# Altium PCB AuxPDU.PcbDoc
Units mm, origin at the board's own origin, x right, y up, seen from the top; angles counter-clockwise.
Board outline 103.03 x 90.12 mm, 2 copper layers (Top Layer, Bottom Layer); 62 components, 27 nets, 168 pads, 55 vias.
Unrouted connection lines stored in the file: 6.
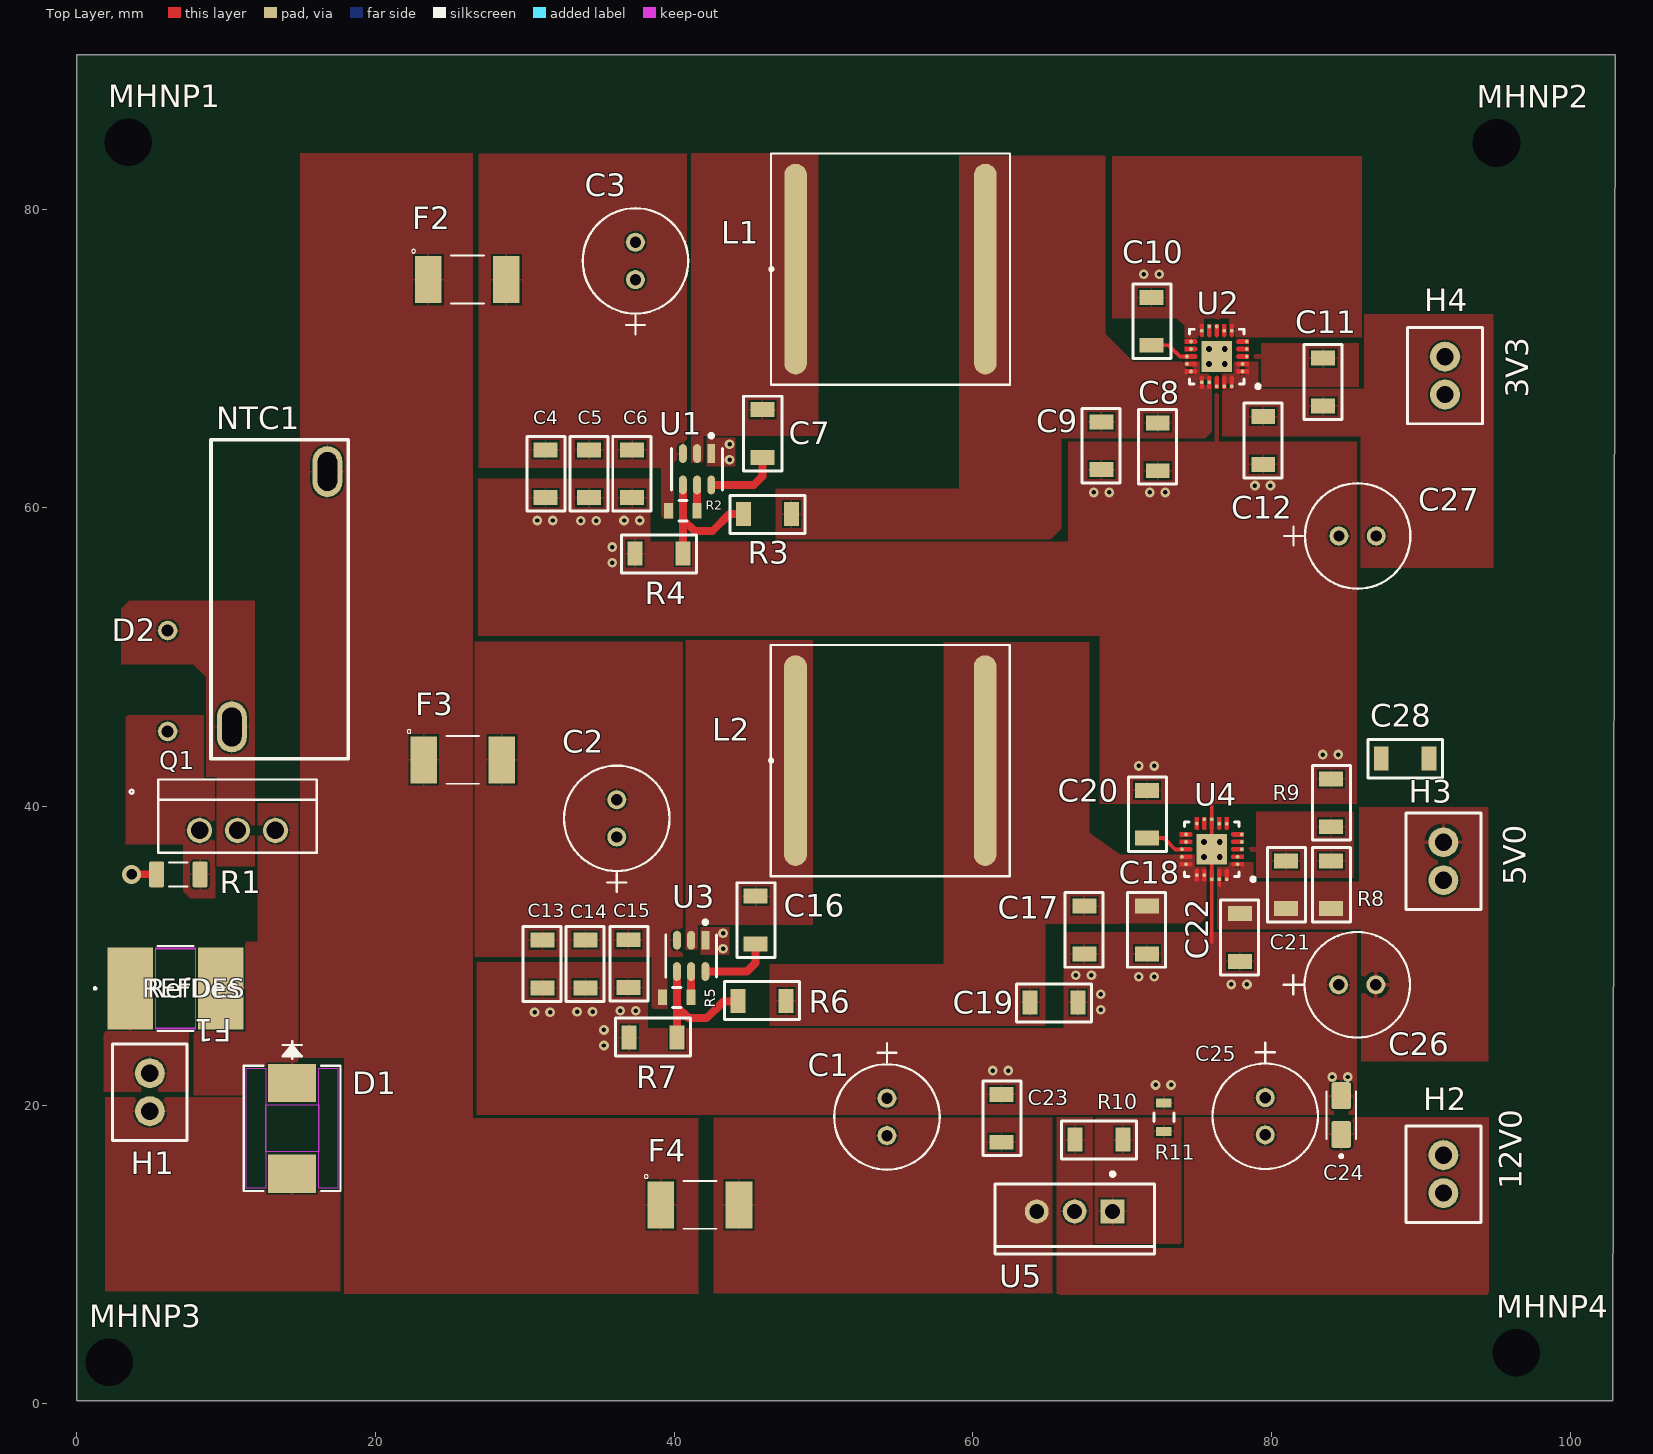
[diagram p0: Top Layer view]
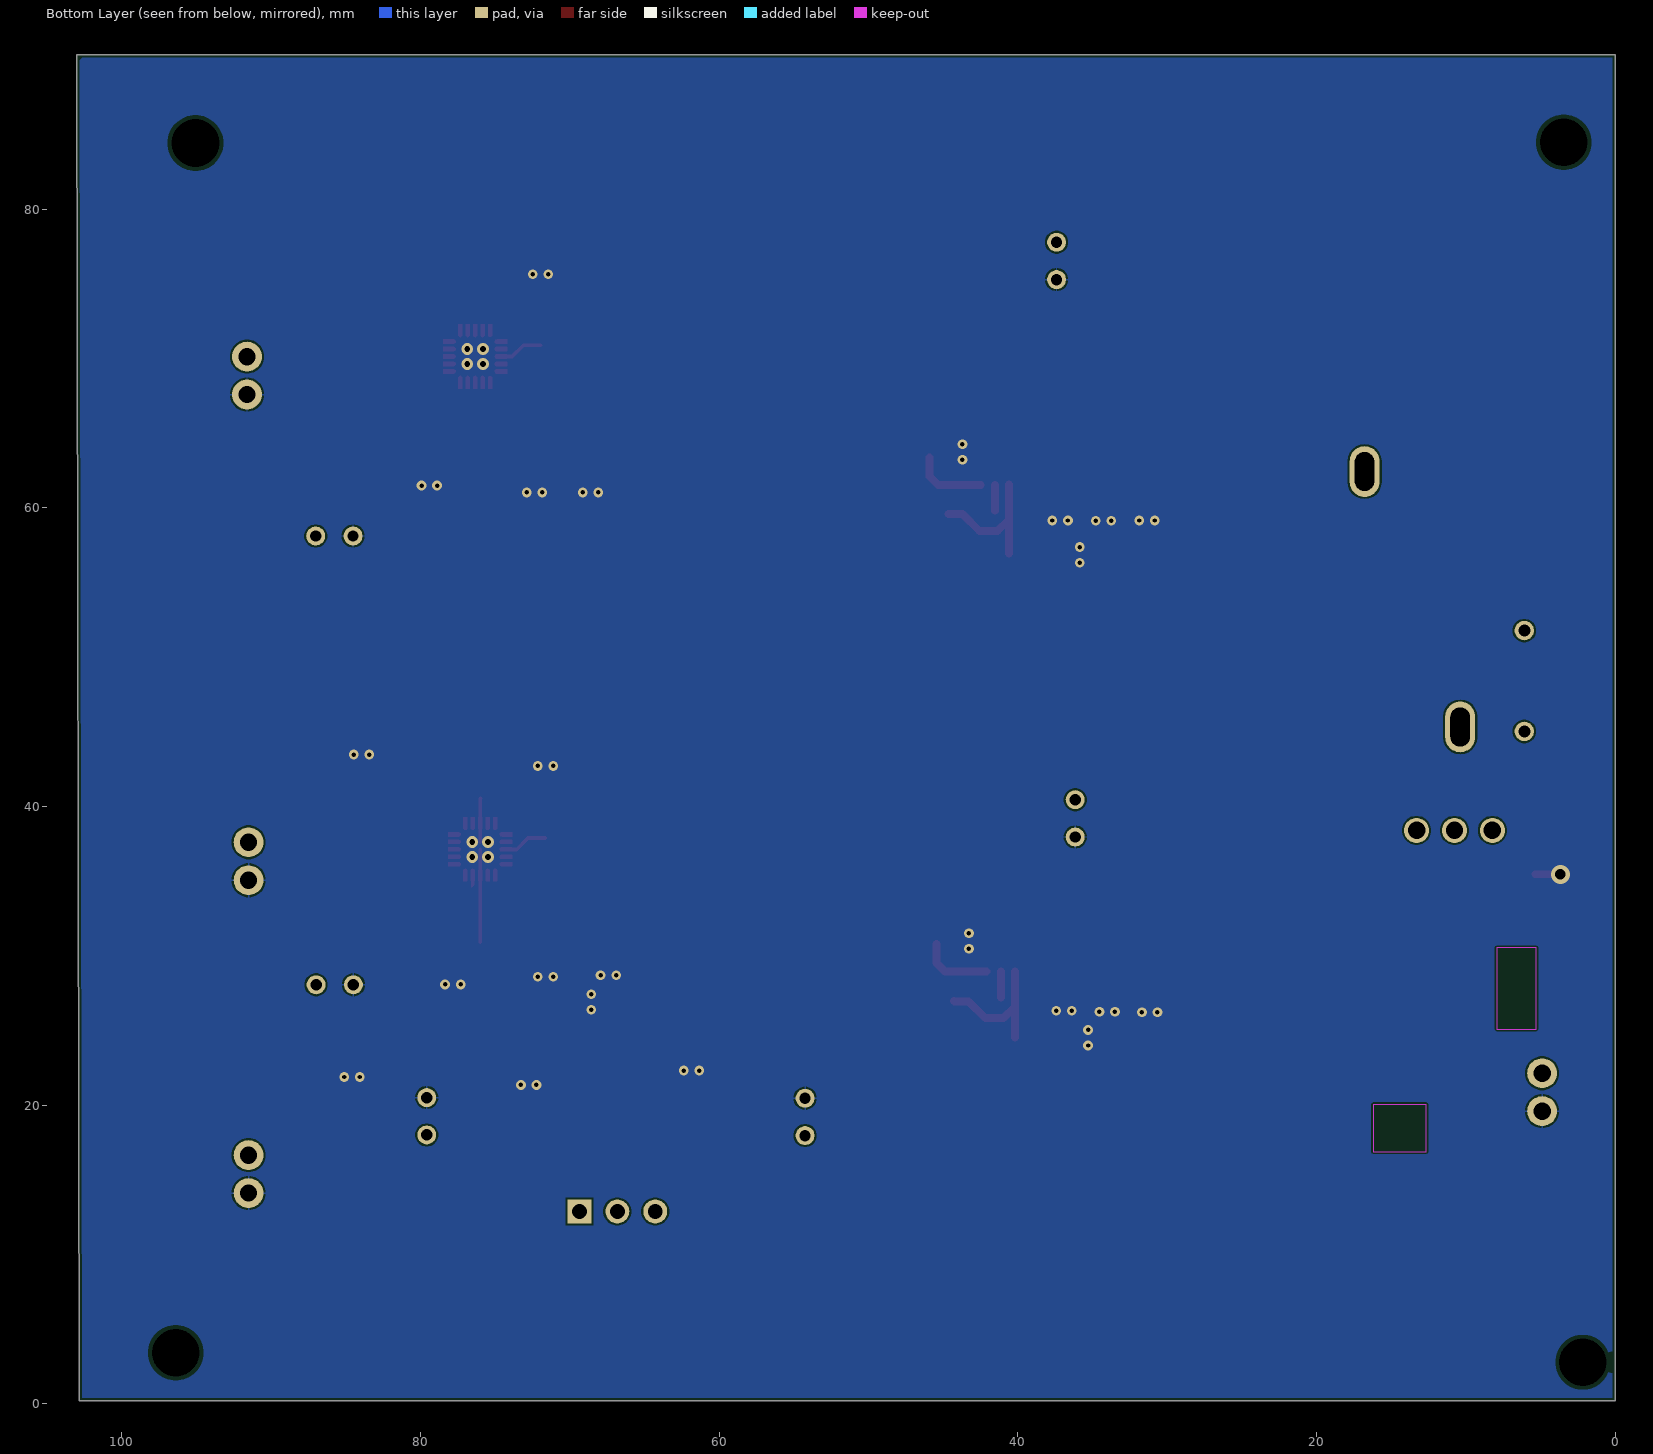
[diagram p1: Bottom Layer view, seen from below]

## Layer stack, top to bottom
Top Solder: solder mask 0.0102, Solder Resist, Dk 3.5
Top Layer: signal copper 0.0356
Dielectric 1: dielectric 0.32, FR-4, Dk 4.8
Bottom Layer: signal copper 0.0356
Bottom Solder: solder mask 0.0102, Solder Resist, Dk 3.5

## Board outline
0,90.348 0,0.229 102.845,0.229 102.845,1.168 103.026,90.348

## Design rules (kind name [scope] priority, off if disabled: settings)
BoardOutlineClearance [All] p1: gap=0.2 ignorepadtopadclearanceinfootprint=FALSE
Clearance [All] p1: gap=0.127 ignorepadtopadclearanceinfootprint=TRUE except(0.254: Arc-Hole Track-Hole SMDPad-Hole THPad-Hole Via-Hole Fill-Hole Poly-Hole Region-Hole Text-Hole)
ComponentClearance [All] p1: gap=0.127 collisioncheckmode=3 verticalgap=0.127 showdistances=TRUE
DiffPairsRouting [All] p1: maxlimit=0.254 minlimit=0.127 mostfreqgap=0.127 toplayer_minwidth=0.127 toplayer_maxwidth=25.4 toplayer_prefwidth=0.127 bottomlayer_minwidth=0.127 bottomlayer_maxwidth=25.4 bottomlayer_prefwidth=0.127 maxuncoupledlength=12.7
Height [All] p1: minheight=0 maxheight=1816.048 prefheight=12.7
HoleSize [All] p1: absolutevalues=TRUE maxlimit=6.3 minlimit=0.3 maxpercent=80.000 minpercent=20.000
HoleToHoleClearance [All] p1: gap=0.254 allowstackedmicrovias=FALSE
MinimumAnnularRing [All] p1: minimumring=0.152
MinimumSolderMaskSliver [All] p1: minsoldermaskwidth=0.152
PlaneClearance [All] p1: clearance=0.127
PlaneConnect PlaneConnectPowerPads [InPadClass('PowerPads')] p1: planeconnectstyle=Direct reliefexpansion=0.508 reliefentries=4 reliefconductorwidth=0.254 reliefairgap=0.254
PlaneConnect [All] p2: pad.planeconnectstyle=Relief pad.reliefexpansion=0.3 pad.reliefentries=4 pad.reliefconductorwidth=0.127 pad.reliefairgap=0.127 via.planeconnectstyle=Direct via.reliefexpansion=0.3 via.reliefentries=4 via.reliefconductorwidth=0.127 via.reliefairgap=0.127
PolygonConnect PolygonConnect_2 [All vs IsNamedPolygon('NETC17_1_L01_P008')] p1: thpad.connectstyle=Relief thpad.reliefconductorwidth=0.254 thpad.reliefentries=4 thpad.polygonreliefangle="90 Angle" thpad.airgapwidth=0.254 smdpad.connectstyle=Direct smdpad.reliefconductorwidth=0.254 smdpad.reliefentries=4 smdpad.polygonreliefangle="90 Angle" smdpad.airgapwidth=0.254 via.connectstyle=Relief via.reliefconductorwidth=0.254 via.reliefentries=4 via.polygonreliefangle="90 Angle" via.airgapwidth=0.254
PolygonConnect PolygonConnect_1 [All vs IsNamedPolygon('5VOUT_L01_P004')] p2: thpad.connectstyle=Relief thpad.reliefconductorwidth=0.254 thpad.reliefentries=4 thpad.polygonreliefangle="90 Angle" thpad.airgapwidth=0.254 smdpad.connectstyle=Direct smdpad.reliefconductorwidth=0.254 smdpad.reliefentries=4 smdpad.polygonreliefangle="90 Angle" smdpad.airgapwidth=0.254 via.connectstyle=Relief via.reliefconductorwidth=0.254 via.reliefentries=4 via.polygonreliefangle="90 Angle" via.airgapwidth=0.254
PolygonConnect PolygonConnectPowerPads [All vs (InPadClass('PowerPads'))] p3: connectstyle=Direct reliefconductorwidth=0.254 reliefentries=4 polygonreliefangle="90 Angle" airgapwidth=0.254
PolygonConnect [All] p4: thpad.connectstyle=Relief thpad.reliefconductorwidth=0.127 thpad.reliefentries=4 thpad.polygonreliefangle="90 Angle" thpad.airgapwidth=0.127 smdpad.connectstyle=Relief smdpad.reliefconductorwidth=0.127 smdpad.reliefentries=4 smdpad.polygonreliefangle="90 Angle" smdpad.airgapwidth=0.127 via.connectstyle=Direct via.reliefconductorwidth=0.127 via.reliefentries=4 via.polygonreliefangle="90 Angle" via.airgapwidth=0.127
RoutingVias [All] p1: holewidth=0.3 width=0.6 viastyle="Through Hole" minholewidth=0.3 minwidth=0.6 maxholewidth=0.6 maxwidth=6.6
SilkToSilkClearance [All] p1: silktosilkclearance=0.127
SilkToSolderMaskClearance [IsPad] p1: minsilkscreentomaskgap=0.127 clearancetoexposedcopper=TRUE
SolderMaskExpansion [All] p1: expansion=0.051 istentingtop=FALSE
SupplyNets "Schematic Supply Nets_7" [InNet('12to12Vin')] p1: voltage=0.000
SupplyNets "Schematic Supply Nets_6" [InNet('Vin')] p2: voltage=0.000
SupplyNets "Schematic Supply Nets_5" [InNet('5Vout')] p3: voltage=0.000
SupplyNets "Schematic Supply Nets_4" [InNet('12Vout')] p4: voltage=0.000
SupplyNets "Schematic Supply Nets_3" [InNet('12to5Vin')] p5: voltage=0.000
SupplyNets "Schematic Supply Nets_2" [InNet('GND')] p6: voltage=0.000
SupplyNets "Schematic Supply Nets_1" [InNet('3.3Vout')] p7: voltage=0.000
SupplyNets "Schematic Supply Nets" [InNet('12to3.3Vin')] p8: voltage=0.000
UnRoutedNet [All] p1: checkbadconnections=TRUE
Width Width_10mil [All] p1: maxlimit=25.4 minlimit=0.254 preferedwidth=0.254 minimp=50.000000 maximp=50.000000 favimp=50.000000
Width Width_6mil [All] p2: maxlimit=25.4 minlimit=0.152 preferedwidth=0.152 minimp=50.000000 maximp=50.000000 favimp=50.000000
Width Power_20mil [All] p3: maxlimit=25.4 minlimit=0.508 preferedwidth=0.508 minimp=50.000000 maximp=50.000000 favimp=50.000000
Width Power_12mil [All] p4: maxlimit=25.4 minlimit=0.305 preferedwidth=0.305 minimp=50.000000 maximp=50.000000 favimp=50.000000
Width Width_5mil [All] p5: maxlimit=25.4 minlimit=0.127 preferedwidth=0.127 minimp=50.000000 maximp=50.000000 favimp=50.000000
19 further rules are at their usual default settings.

## Components (designator, comment, footprint, x,y, rotation, side; value= is the part's Value field where it differs from the comment)
C1 "100 uF" CAP_YX_6P3X11_RUB 54.254,20.472 r270 top
C2 "100 uF" CAP_YX_6P3X11_RUB 36.166,37.962 r90 top
C3 "100 uF" CAP_YX_6P3X11_RUB 37.416,75.287 r90 top
C4 "100 nF" "CAP 1206" 31.391,58.68 r90 top
C5 "10 uF" "CAP 1206" 34.318,65.894 r270 top
C6 "10 uF" "CAP 1206" 37.195,65.894 r270 top
C7 "100 nF" "CAP 1206" 45.912,61.369 r90 top
C8 "22 uF" "CAP 1206" 72.391,67.694 r270 top
C9 "10 uF" "CAP 1206" 68.616,67.769 r270 top
C10 "10nF" "CAP 1206" 71.971,68.882 r90 top
C11 "10nF" "CAP 1206" 83.464,72.034 r270 top
C12 "47uF" "CAP 1206" 79.451,68.123 r270 top
C13 "10uF" "CAP 1206" 31.191,33.062 r270 top
C14 "10 uF" "CAP 1206" 34.068,33.071 r270 top
C15 "100 nF" "CAP 1206" 36.948,25.879 r90 top
C16 "100nF" "CAP 1206" 45.462,28.794 r90 top
C17 "22uF" "CAP 1206" 67.475,35.35 r270 top
C18 "22uF" "CAP 1206" 71.666,35.35 r270 top
C19 "10 uF" "CAP 1206" 61.834,26.887 r0 top
C20 "10nF" "CAP 1206" 71.666,35.883 r90 top
C21 "10nF" "CAP 1206" 80.981,31.159 r90 top
C22 "47uF" "CAP 1206" 77.889,34.842 r270 top
C23 "10 uF" "CAP 1206" 61.925,15.519 r90 top
C24 "10 uF Tantalum" CAPMP3216X180N 84.671,19.342 r90 top
C25 "100 uF" CAP_YX_6P3X11_RUB 79.585,20.516 r270 top
C26 "100 uF" CAP_YX_6P3X11_RUB 84.495,28.067 r0 top
C27 "100 uF" CAP_YX_6P3X11_RUB 84.521,58.119 r0 top
C28 "22 uF" "CAP 1206" 85.344,43.231 r0 top
D1 "TVS DIODE 14VWM 23.2VC DO214AB" SMCJSERIES_LTF-M 14.427,18.451 r270 top
D2 "DIODE ZENER 10V 500MW DO35" BZX79C10 6.096,45.034 r90 top
F1 "" CHIP_2920L_7P98X5P44_LTF-M 6.616,27.824 r0 top
F2 "1812L110/33MR" 1812L110_33MR 26.162,75.287 r0 top
F3 "1812L110/33MR" 1812L110_33MR 25.857,43.129 r0 top
F4 "1812L110/33MR" 1812L110_33MR 41.732,13.335 r0 top
H1 "Header Pins" "HEADER PINS" 1.092,21.895 r270 top
H2 "Header Pins" "HEADER PINS" 87.706,16.408 r270 top
H3 "Header Pins" "HEADER PINS" 87.706,37.358 r270 top
H4 "Header Pins" "HEADER PINS" 87.808,69.875 r270 top
L1 "3.3 uH" "17UH INDUCTOR" 40.974,67.968 r0 top
L2 "3.3uH" "17UH INDUCTOR" 40.964,35.059 r0 top
MHNP1 "Mounting Hole Non-Plated 3.2 mm" MTHNP3P2MM 3.454,84.48 r90 top
MHNP2 "Mounting Hole Non-Plated 3.2 mm" MTHNP3P2MM 95.072,84.43 r90 top
MHNP3 "Mounting Hole Non-Plated 3.2 mm" MTHNP3P2MM 2.184,2.794 r90 top
MHNP4 "Mounting Hole Non-Plated 3.2 mm" MTHNP3P2MM 96.393,3.429 r90 top
NTC1 "ICL 20 OHM 25% 10A 29MM" AS3220010 10.389,45.333 r90 top
Q1 "MOSFET P-CH 50V 9.7A TO220AB" IRF9Z20PBF 8.23,38.405 r0 top
R1 "100k" RESC3116X65N 6.807,35.458 r0 top
R2 "8.6kΩ ±0.25%" FP-RK73G2A-MFG 40.591,59.808 r0 top
R3 "33.2k" "CAP 1206" 42.653,59.583 r0 top
R4 "10k" "CAP 1206" 35.384,56.937 r0 top
R5 "8.6kΩ ±0.25%" FP-RK73G2A-MFG 40.175,27.226 r0 top
R6 "54.9k" "CAP 1206" 49.501,26.991 r180 top
R7 "10k" "CAP 1206" 42.201,24.54 r180 top
R8 "12.4k" "CAP 1206" 83.985,31.159 r90 top
R9 "2.37k" "CAP 1206" 83.985,36.645 r90 top
R10 "1k" "CAP 1206" 64.846,17.704 r0 top
R11 "8.6kΩ ±0.25%" FP-RK73G2A-MFG 72.796,19.202 r90 top
U1 "TPS562208" TPS562208 41.033,67.159 r270 top
U2 "TPS7A8400ARGRT" TPS7A8400ARGRT 80.151,70.137 r180 top
U3 "TPS562208" TPS562208 40.636,34.577 r270 top
U4 "TPS7A8400ARGRT" TPS7A8400ARGRT 79.816,37.136 r180 top
U5 "LM1084IT-ADJ/NOPB" NDE0003A 66.825,12.893 r180 top

## Footprints (in the part's own frame and the unit in brackets; to place one, negate y for a bottom-side part, rotate by r counter-clockwise, add the part's x,y. Pads: shape width x height; smd on the part's side, far side on the other; paste and mask are expansions set on the pad)
"17UH INDUCTOR" [mil]
  oval 60x555 smd paste+0 mask+0: 1(282.14,315.71) 2(782.14,315.71)
  silkscreen extent 213,11 847,621, body extent 35,16 1030,616, height 380
1812L110_33MR [mm] "PTC Reset Fuse"
  rect 1.78x3.15 smd: 1(-2.615,0) 2(2.615,0)
  silkscreen extent -3.73,-1.6 1.1,2.03
AS3220010 [mm] "Inrush Current Limiter 20 Ohms ±25% 10 A 1.142\" (29.00mm)"
  oval 3.4x2 hole 1.3 slot 2.6 at 0 deg: 1(0,0) 2(17.1,-6.4)
  silkscreen extent -2.12,-7.8 19.23,1.4
BZX79C10 [mm] "2 Hole, Lead Diameter 0.46-0.533 mm"
  round 1.3 hole 0.8: 1(0,0) 2(6.75,0)
"CAP 1206" [mm] "Generic SMD capacitor with 1206 package (3216 metric)"
  rect 1x1.6 smd: 1(2.007,0) 2(5.207,0)
  silkscreen extent 1.11,-1.3 6.11,1.25
CAP_YX_6P3X11_RUB [mil]
  round 50 / inner round 60 / far side round 50 hole 30 paste-99999 mask+0: 1(0,0) 2(98.43,0)
  silkscreen extent -145,-139 188,139, body extent -85,-134 184,134, height 493
CAPMP3216X180N [mm]
  rrect25% 1.81x1.32 smd: 1(-1.3,0) 2(1.3,0)
  silkscreen extent -2.85,-0.98 1.6,0.98, body extent -1.6,-0.8 1.6,0.8, height 1.8
CHIP_2920L_7P98X5P44_LTF-M [mil]
  rect 120x216 smd paste+0 mask+0: 1(-119,0) 2(119,0)
  Top Layer keep-out region: -52.17,-105 -52.17,105 52.17,105 52.17,-105
  Keep-Out Layer region: -52.17,-107 -52.17,107 52.17,107 52.17,-107
  silkscreen extent -215,-112 47,112, body extent -157,-107 157,107, height 49
FP-RK73G2A-MFG [mm]
  rect 0.6x1.05 smd paste+0 mask+0: 1(-0.95,0) 2(0.95,0)
  silkscreen extent -0.28,-0.67 0.28,0.67, body extent -1.35,-0.77 1.35,0.77, height 0.25
"HEADER PINS" [mm]
  round 2 hole 1.16: 1(-0.254,3.81) 2(2.286,3.81)
  silkscreen extent -2.21,1.31 4.24,6.31
IRF9Z20PBF [mil] "TO-220AB_HIGHVOLTAGE_VIS"
  round 66 hole 46 paste-99999 mask+0: D(100,0) G(0,0) S(200,0)
  silkscreen extent -184,-59 309,134, body extent -104,-54 304,129, height 640
MTHNP3P2MM [mm] "Mounting Hole Non Plated 3.2 mm hole"
  round 1 hole 3.2 unplated: ""(0,0)
NDE0003A [mm] "FM, 3-Leads, Body 10.7x4.7mm, Pitch 2.54mm"
  rect 1.6x1.6 hole 1: 1(-2.54,0)
  round 1.6 hole 1: 2(0,0) 3(2.54,0)
  silkscreen extent -5.35,-2.62 5.35,2.85, body extent -5.4,-1.9 5.4,2.9, height 19.4
RESC3116X65N [mm]
  rrect25% 1.02x1.73 smd: 1(-1.455,0) 2(1.455,0)
  silkscreen extent -0.63,-0.8 0.63,0.8
SMCJSERIES_LTF-M [mil]
  rect 101x126 smd paste+0 mask+0: 1(-119.5,0) 2(119.5,0)
  Top Layer keep-out region: -62.99,-69.88 -62.99,69.88 62.01,69.88 62.01,-69.88
  Top Layer keep-out region: -158,69.88 -158,120.5 158,120.5 158,69.88
  Top Layer keep-out region: -158,-120.5 -158,-69.88 158,-69.88 158,-120.5
  Keep-Out Layer region: -62.99,-69.88 -62.99,69.88 62.01,69.88 62.01,-69.88
  silkscreen extent -230,-128 165,128, body extent -160,-123 160,123, height 105
TPS7A8400ARGRT [mm] "Linear Voltage Regulator IC Positive Adjustable/Programmable 1 Output 3A"
  round 0.252 smd paste-1000 mask+0: 1(2.085,1) 2(2.085,0.5) 3(1.8,0) 4(1.8,-0.5) 5(1.8,-1) 6(2.81,-1.725) 7(3.31,-1.725) 8(3.81,-2.01) 9(4.31,-2.01) 10(4.81,-1.725) 11(5.535,-1) 12(5.535,-0.5) 13(5.81,0) 14(5.81,0.5) 15(5.535,1) 16(4.81,1.725) 17(4.31,1.725) 18(3.81,2) 19(3.31,2) 20(2.81,2)
  rect 2.05x2.05 smd paste-1000 mask+0: 21(3.81,0)
  Top Layer region: 2.95,2.15 2.95,1.44 2.939,1.386 2.909,1.341 2.864,1.311 2.81,1.3 2.81,1.3 2.756,1.311 2.711,1.341 2.681,1.386 2.67,1.44 2.67,1.44 2.67,2.15
  Top Layer region: 3.45,2.15 3.45,1.44 3.439,1.386 3.409,1.341 3.364,1.311 3.31,1.3 3.31,1.3 3.256,1.311 3.211,1.341 3.181,1.386 3.17,1.44 3.17,1.44 3.17,2.15
  Top Layer region: 3.95,2.15 3.95,1.44 3.939,1.386 3.909,1.341 3.864,1.311 3.81,1.3 3.81,1.3 3.756,1.311 3.711,1.341 3.681,1.386 3.67,1.44 3.67,1.44 3.67,2.15
  Top Layer region: 4.45,2.15 4.45,1.44 4.439,1.386 4.409,1.341 4.364,1.311 4.31,1.3 4.31,1.3 4.256,1.311 4.211,1.341 4.181,1.386 4.17,1.44 4.17,1.44 4.17,2.15
  Top Layer region: 4.95,2.15 4.95,1.44 4.939,1.386 4.909,1.341 4.864,1.311 4.81,1.3 4.81,1.3 4.756,1.311 4.711,1.341 4.681,1.386 4.67,1.44 4.67,1.44 4.67,2.15
  Top Layer region: 5.96,0.86 5.25,0.86 5.196,0.871 5.151,0.901 5.121,0.946 5.11,1 5.11,1 5.121,1.054 5.151,1.099 5.196,1.129 5.25,1.14 5.25,1.14 5.96,1.14
  Top Layer region: 5.96,0.36 5.25,0.36 5.196,0.371 5.151,0.401 5.121,0.446 5.11,0.5 5.11,0.5 5.121,0.554 5.151,0.599 5.196,0.629 5.25,0.64 5.25,0.64 5.96,0.64
  Top Layer region: 5.96,-0.14 5.25,-0.14 5.196,-0.129 5.151,-0.099 5.121,-0.054 5.11,0 5.11,0 5.121,0.054 5.151,0.099 5.196,0.129 5.25,0.14 5.25,0.14 5.96,0.14
  Top Layer region: 5.96,-0.64 5.25,-0.64 5.196,-0.629 5.151,-0.599 5.121,-0.554 5.11,-0.5 5.11,-0.5 5.121,-0.446 5.151,-0.401 5.196,-0.371 5.25,-0.36 5.25,-0.36 5.96,-0.36
  Top Layer region: 5.96,-1.14 5.25,-1.14 5.196,-1.129 5.151,-1.099 5.121,-1.054 5.11,-1 5.11,-1 5.121,-0.946 5.151,-0.901 5.196,-0.871 5.25,-0.86 5.25,-0.86 5.96,-0.86
  Top Layer region: 4.67,-2.15 4.67,-1.44 4.681,-1.386 4.711,-1.341 4.756,-1.311 4.81,-1.3 4.81,-1.3 4.864,-1.311 4.909,-1.341 4.939,-1.386 4.95,-1.44 4.95,-1.44 4.95,-2.15
  Top Layer region: 4.17,-2.15 4.17,-1.44 4.181,-1.386 4.211,-1.341 4.256,-1.311 4.31,-1.3 4.31,-1.3 4.364,-1.311 4.409,-1.341 4.439,-1.386 4.45,-1.44 4.45,-1.44 4.45,-2.15
  Top Layer region: 3.67,-2.15 3.67,-1.44 3.681,-1.386 3.711,-1.341 3.756,-1.311 3.81,-1.3 3.81,-1.3 3.864,-1.311 3.909,-1.341 3.939,-1.386 3.95,-1.44 3.95,-1.44 3.95,-2.15
  Top Layer region: 3.17,-2.15 3.17,-1.44 3.181,-1.386 3.211,-1.341 3.256,-1.311 3.31,-1.3 3.31,-1.3 3.364,-1.311 3.409,-1.341 3.439,-1.386 3.45,-1.44 3.45,-1.44 3.45,-2.15
  Top Layer region: 2.67,-2.15 2.67,-1.44 2.681,-1.386 2.711,-1.341 2.756,-1.311 2.81,-1.3 2.81,-1.3 2.864,-1.311 2.909,-1.341 2.939,-1.386 2.95,-1.44 2.95,-1.44 2.95,-2.15
  Top Layer region: 1.66,-0.86 2.37,-0.86 2.424,-0.871 2.469,-0.901 2.499,-0.946 2.51,-1 2.51,-1 2.499,-1.054 2.469,-1.099 2.424,-1.129 2.37,-1.14 2.37,-1.14 1.66,-1.14
  Top Layer region: 1.66,-0.36 2.37,-0.36 2.424,-0.371 2.469,-0.401 2.499,-0.446 2.51,-0.5 2.51,-0.5 2.499,-0.554 2.469,-0.599 2.424,-0.629 2.37,-0.64 2.37,-0.64 1.66,-0.64
  Top Layer region: 1.66,0.14 2.37,0.14 2.424,0.129 2.469,0.099 2.499,0.054 2.51,0 2.51,0 2.499,-0.054 2.469,-0.099 2.424,-0.129 2.37,-0.14 2.37,-0.14 1.66,-0.14
  Top Layer region: 1.66,0.64 2.37,0.64 2.424,0.629 2.469,0.599 2.499,0.554 2.51,0.5 2.51,0.5 2.499,0.446 2.469,0.401 2.424,0.371 2.37,0.36 2.37,0.36 1.66,0.36
  Top Layer region: 1.66,1.14 2.37,1.14 2.424,1.129 2.469,1.099 2.499,1.054 2.51,1 2.51,1 2.499,0.946 2.469,0.901 2.424,0.871 2.37,0.86 2.37,0.86 1.66,0.86
  silkscreen extent 0.92,-1.83 5.64,2.12, body extent 1.56,-2.25 6.06,2.25, height 0.25
TPS562208 [mil] "Buck Switching Regulator IC Positive Adjustable 0.768V 1 Output 2A SOT-23-6 Thin, TSOT-23-6"
  rect 49.39x20.95 smd paste+0 mask+0: 1(138.65,57.4)
  rrect100% 49.39x20.95 smd paste+0 mask+0: 2(138.65,20) 3(138.65,-17.4) 4(221.35,-17.4) 5(221.35,20) 6(221.35,57.4)
  silkscreen extent 87,-47 235,87, body extent 110,-41 250,81, height 10

## Part data
C1 C2 C3 C25 C26 C27: library part 35ZLH100MEFC6.3X11, "100 uF electrolytic capacitor", Manufacturer_Name=Rubycon, Copyright="Copyright (C) 2025 Ultra Librarian. All rights reserved.", Manufacturer_Part_Number=35ZLH100MEFC6.3X11
C4 C5 C6 C7 C8 C9 C10 C11 C12 C13 C14 C15 C16 C17 C18 C19 C20 C21 C22 C23 C28: library part "Cap 1206", "Generic SMD capacitor with 1206 package (3216 metric)"
C24: library part TAJA106K016RNJ, "10 ÂµF Molded Tantalum Capacitors 16 V 1206 (3216 Metric) 3Ohm", Package="1206 AVX", Check_prices=https://www.snapeda.com/parts/TAJA106K016RNJ/Kyocera/view-part/?ref=eda, MF="KYOCERA AVX", MP=TAJA106K016RNJ, SnapEDA_Link=https://www.snapeda.com/parts/TAJA106K016RNJ/Kyocera/view-part/?ref=snap
D1: library part SMCJ14A, "Unidirectional"
D2: library part BZX79C10, Supplier Part Number 1=BZX79C10-ND, ComponentLink1Description="New link", Supplier 1=DigiKey
F1: library part 2920L150DR, "Description", Manufacturer_Name="Littelfuse Inc", Copyright="Copyright (C) 2025 Ultra Librarian. All rights reserved.", Manufacturer_Part_Number=2920L150DR, RefDes=RefDes, Type=Type
F2 F3 F4: Package=None, Availability=Unavailable, MF="{'manufacturer': u'Littelfuse Inc.'}", MP=1812L110/33MR, Price=None
L1 L2: library part MSS7341-332NLD, "3.3 ÂµH Shielded Drum Core Inductor 3.95 A 18mOhm Max Nonstandard", Package=None, Check_prices=https://www.snapeda.com/parts/MSS7341-332NLD/Coilcraft/view-part/?ref=eda, MF=Coilcraft, MP=MSS7341-332NLD, SnapEDA_Link=https://www.snapeda.com/parts/MSS7341-332NLD/Coilcraft/view-part/?ref=snap
MHNP1 MHNP2 MHNP3 MHNP4: library part MTHNP3P2MM
NTC1: library part AS3220010, Supplier Part Number 1=570-AS3220010-ND, Supplier 1=DigiKey
Q1: library part IRF9Z20PBF, ComponentLink1Description="New link", Supplier 1=Newark, Supplier 2=DigiKey, Supplier Part Number 1=IRF9Z20PBF, Supplier Part Number 2=IRF9Z20PBF-ND
R1: library part RC1206FR-10100KL, Package=None, Availability=Unavailable, MF="{'manufacturer': u'YAGEO'}", MP=RC1206FR-10100KL, Price=None
R2 R5 R11: library part CMP-04015-106177-1, "8.06kΩ ±0.25% 0.125W Chip Resistor 0805 Thick Film AEC-Q200 Qualified", RoHS Compliant=Yes
R3 R4 R6 R7 R8 R9 R10: library part "Res 1206", "Generic SMD resistor with 1206 package (3216 metric)"
U1 U3: "Buck Switching Regulator IC Positive Adjustable 0.768V 1 Output 2A SOT-23-6 Thin, TSOT-23-6"
U2 U4: "Linear Voltage Regulator IC Positive Adjustable/Programmable 1 Output 3A"
U5: library part CMP-0062-02529-3, "5A Low Dropout Positive Regulators, 3-pin TO-220, Pb-Free", Manufacturer="Texas Instruments", PackageTopMarking=NSUZXYTTE#*LM1084*IT-ADJ, PowerWise=N, ComponentLink1Description="Datasheet URL", ComponentLink1URL=http://www.ti.com/general/docs/lit/getliterature.tsp?genericPartNumber=LM1084&fileType=pdf, CompType="LDO IC", PackageDescription="TO-220, Molded, 3 Lead, Straight", PackageReference=NDE0003A, PinCount=3, RoHS=Y

## Via types
v1: diameter 0.65, hole 0.3, Top Layer to Bottom Layer, 46 vias
v2: diameter 0.8, hole 0.4, Top Layer to Bottom Layer, 8 vias
v3: diameter 1.27, hole 0.711, Top Layer to Bottom Layer, 1 vias

## Nets (pads, with @x,y where several pads share a name; then routed paths per layer and width w, separated by ;. In a path a pad name is that pad's centre, name@x,y a point inside that pad or via, vN(x,y) a via of type N, cw(c..) or ccw(c..) an arc to the next point about the centre after c; other vN are vias at no path point)
3.3Vout: C11.2 C12.1 C27.2 H4.1 U2.1 U2.2 U2.19 U2.20
5Vout: C21.1 C22.1 C26.2 H3.1 R8.1 U4.1 U4.19 U4.20
12to3.3Vin: C3.2 C4.2 C5.1 C6.1 F2.2 R2.1 U1.3
12to5Vin: C2.2 C13.1 C14.1 C15.2 F3.2 R5.1 U3.3
12to12Vin: C1.2 C23.1 F4.2 U5.3
12Vout: C24.1 C25.2 H2.1 R10.1 U5.2
GND: C1.1 C2.1 C3.1 C4.1 C5.2 C6.2 C8.2 C9.2 C10.2 C12.2 C13.2 C14.2 C15.1 C17.2 C18.2 C19.2 C20.2 C22.2 C23.2 C24.2 C25.1 C26.1 C27.1 C28.2 D1.2 H1.2 H2.2 H3.2 H4.2 R1.1 R4.1 R7.2 R9.2 R11.2 U1.1 U2.6 U2.8 U2.10 U2.11 U2.18 U2.21 U3.1 U4.8 U4.18 | length 10.4
  Top Layer w0.254: 75.984,40.557 76.006,40.535 U4.8 76.006,39.078 75.999,39.071 75.999,38.651 76.006,38.644 76.006,37.636 ; 76.006,30.927 U4.18 76.006,35.194 U4.18@76.013,35.201 ; 76.006,37.136 76.006,36.636 76.006,35.628 76.013,35.621
  Top Layer w0.5: v3(3.683,35.458) R1.1
  other v1: 72.238,21.361 73.279,21.361 84.074,21.895 85.115,21.895 61.341,22.327 62.382,22.327 35.306,24.003 35.306,25.044 30.658,26.238 31.699,26.238 33.503,26.264 34.544,26.264 36.398,26.34 37.44,26.34 68.58,26.391 68.58,27.432 77.318,28.092 78.359,28.092 71.12,28.6 72.161,28.6 66.904,28.702 67.945,28.702 43.282,30.48 43.282,31.521 71.12,42.723 72.161,42.723 83.439,43.485 84.48,43.485 35.865,56.337 35.865,57.379 33.757,59.131 34.798,59.131 30.836,59.157 31.877,59.157 36.652,59.157 37.694,59.157 68.097,61.036 69.139,61.036 71.857,61.036 72.898,61.036 78.892,61.493 79.934,61.493 43.713,63.221 43.713,64.262 71.45,75.641 72.492,75.641
  other v2: 75.472,36.628 76.539,36.628 75.498,37.644 76.539,37.644 75.807,69.629 76.874,69.629 75.833,70.645 76.874,70.645
NetC7_1: C7.1 U1.6 | length 4.9
  Top Layer w0.532: U1.6@42.491,61.53 45.335,61.53 45.912,62.106 C7.1
NetC7_2: C7.2 L1.1 U1.2
NetC8_1: C8.1 C9.1 C28.1 L1.2 R3.2 U2.14 U2.15 U2.16 U2.17
NetC10_1: C10.1 U2.13 | length 2.7
  Top Layer w0.254: C10.1 73.114,70.889 73.868,70.135 U2.13@74.311,70.135
NetC11_1: C11.1 U2.3
NetC16_1: C16.1 U3.6 | length 4.9
  Top Layer w0.532: U3.6 44.885,28.955 45.462,29.531 C16.1
NetC16_2: C16.2 L2.1 U3.2
NetC17_1: C17.1 C18.1 C19.1 L2.2 R6.1 U4.14 U4.15 U4.16 U4.17
NetC20_1: C20.1 U4.13 | length 2.7
  Top Layer w0.254: C20.1 72.809,37.89 73.563,37.136 U4.13
NetC21_2: C21.2 R8.2 R9.1 U4.3
NetD1_1: D1.1 F1.2 Q1.S
NetD2_1: D2.1 Q1.G R1.2
NetD2_2: D2.2 NTC1.1 Q1.D
NetF2_1: F2.1 F3.1 F4.1 NTC1.2
NetR2_2: R2.2 U1.5 | length 1.7
  Top Layer w0.532: R2.2 U1.5
NetR3_1: R3.1 R4.2 U1.4 | length 9.5
  Top Layer w0.532: R4.2@40.594,56.937 40.594,59.212 ; U1.4@40.594,61.58 40.594,59.212 ; R3.1 43.707,59.583 42.587,58.462 41.366,58.462 40.616,59.212 40.594,59.212
NetR5_2: R5.2 U3.5 | length 1.7
  Top Layer w0.532: R5.2 U3.5
NetR6_2: R6.2 R7.1 U3.4 | length 9.3
  Top Layer w0.532: R7.1 40.194,26.587 ; U3.4 40.194,26.587 ; R6.2 44.26,26.958 43.307,26.958 42.187,25.837 40.966,25.837 40.216,26.587 40.194,26.587
NetR10_2: R10.2 R11.1 U5.1
Vin: F1.1 H1.1
pads on no net: MHNP1. MHNP2. MHNP3. MHNP4. U2.4 U2.5 U2.7 U2.9 U2.12 U4.2 U4.4 U4.5 U4.6 U4.7 U4.9 U4.10 U4.11 U4.12 U4.21

## Polygon pours and split planes (outlines as drawn)
NetD1_1 on Top Layer "NETD1_1_L01_P035" (solid, pour order 35): 12.141,40.228 14.889,40.228 14.889,23.093 16.368,23.093 16.368,20.066 7.849,20.066 7.849,30.937 12.141,30.937
NetD2_2 on Top Layer "NETD2_2_L01_P036" (solid, pour order 36): 7.798,49.53 8.661,48.666 8.661,41.986 9.373,41.986 9.373,42.443 9.373,35.992 11.938,35.992 11.938,44.07 11.938,53.797 3.531,53.797 2.997,53.264 2.997,49.53
NetD2_1 on Top Layer "NETD2_1_L01_P037" (solid, pour order 37): 7.137,37.49 7.137,34.315 7.595,33.858 9.271,33.858 9.271,46.122 3.302,46.152 3.302,37.49
GND on Top Layer "GND_L01_P034" (solid, pour order 34): 1.905,20.549 17.653,20.549 17.653,7.544 1.905,7.544
Vin on Top Layer "VIN_L01_P033" (solid, pour order 33): 1.829,30.785 1.829,20.904 7.493,20.904 7.493,30.785
GND on Top Layer "GND_L01_P027" (solid, pour order 27): 38.709,51.437 68.516,51.437 68.516,57.467 68.605,57.556 68.428,57.734 38.409,57.734 38.409,61.939 26.899,61.939 26.899,51.437
GND on Top Layer "GND_L01_P016" (solid, pour order 16): 26.797,19.355 66.078,19.355 66.078,25.146 38.234,25.146 38.234,29.564 26.797,29.564
GND on Top Layer "GND_L01_P006" (solid, pour order 6): 66.078,31.572 66.078,19.355 85.725,19.355 85.725,31.572
GND on Top Layer "GND_L01_P001" (solid, pour order 1): 76.201,64.44 76.201,69.139 76.479,69.139 76.479,68.71 76.479,64.44 85.725,64.44 85.725,40.187 68.516,40.187 68.516,51.437 66.391,53.562 66.391,64.44
GND on Top Layer "GND_L01_P028" (solid, pour order 28): 77.191,72.712 77.191,71.437 77.481,71.437 86.055,71.437 86.055,83.562 69.341,83.562 69.341,72.712 73.666,72.712 74.191,72.187 74.191,70.997 75.041,70.997 75.041,71.437 75.481,71.437 75.481,72.712 76.191,72.712 76.191,71.137 76.491,71.137 76.491,72.712
NetF2_1 on Top Layer "NETF2_1_L01_P032" (solid, pour order 32): 14.986,23.19 17.907,23.19 17.907,7.366 41.605,7.366 41.605,19.126 26.518,19.126 26.518,83.75 14.986,83.75
12Vout on Top Layer "12VOUT_L01_P031" (solid, pour order 31): 94.717,7.315 94.539,7.493 94.539,19.202 74.168,19.202 74.168,10.439 68.148,10.439 68.021,10.617 68.021,19.202 65.634,19.202 65.634,7.391 65.608,7.366 65.659,7.315
NetR10_2 on Top Layer "NETR10_2_L01_P030" (solid, pour order 30): 68.174,19.204 68.174,10.719 73.939,10.719 74.092,10.871 73.965,10.998 73.965,19.15
12to12Vin on Top Layer "12TO12VIN_L01_P029" (solid, pour order 29): 65.329,7.417 65.329,19.152 42.642,19.152 42.642,7.417
3.3Vout on Top Layer "3.3VOUT_L01_P023" (solid, pour order 23): 85.979,64.812 85.979,55.98 94.862,55.98 94.862,72.98 86.226,72.98 86.226,67.987 76.701,67.987 76.701,64.812
NetC16_2 on Top Layer "NETC16_2_L01_P011" (solid, pour order 11): 40.798,32.087 40.791,32.08 40.791,30.412 41.491,30.412 41.591,30.512 41.591,32.087 49.291,32.087 49.291,34.373 49.291,51.137 40.798,51.137
12to3.3Vin on Top Layer "12TO3.3VIN_L01_P026" (solid, pour order 26): 39.141,62.687 39.141,59.262 39.966,59.262 39.966,63.012 40.866,63.012 40.866,83.718 26.916,83.718 26.916,62.687
3.3Vout on Top Layer "3.3VOUT_L01_P025" (solid, pour order 25): 76.701,69.777 76.701,67.561 79.128,67.561 79.128,69.777
NetC8_1 on Top Layer "NETC8_1_L01_P024" (solid, pour order 24): 70.764,69.774 70.238,69.247 70.238,64.662 75.559,64.662 75.991,65.094 75.991,69.774
NetC11_1 on Top Layer "NETC11_1_L01_P022" (solid, pour order 22): 79.332,70.277 77.641,70.277 77.641,69.997 79.319,69.997 79.332,70.002 79.332,68.117 85.85,68.117 85.85,71.018 79.332,71.018
5Vout on Top Layer "5VOUT_L01_P004" (solid, pour order 4): 86.017,31.794 86.017,22.962 94.526,22.962 94.526,39.962 85.89,39.962 85.89,34.969 76.365,34.969 76.365,31.794
GND on Top Layer "GND_L01_P021" (solid, pour order 21): 42.179,64.694 42.179,62.789 44.084,62.789 44.084,64.694
NetC7_2 on Top Layer "NETC7_2_L01_P020" (solid, pour order 20): 41.148,64.712 41.148,63.012 41.816,63.012 41.966,63.162 41.966,64.846 49.641,64.846 49.641,66.998 49.641,83.762 41.148,83.762
NetC8_1 on Top Layer "NETC8_1_L01_P019" (solid, pour order 19): 59.103,61.287 46.816,61.287 46.816,57.911 65.228,57.911 65.912,58.595 65.912,64.662 70.739,64.662 70.739,69.774 68.859,71.654 68.859,83.565 59.103,83.565
NetC17_1 on Top Layer "NETC17_1_L01_P008" (solid, pour order 8): 74.564,36.776 69.917,36.776 69.888,36.747 69.888,32.175 75.222,32.175 75.641,32.594 75.641,36.776
5Vout on Top Layer "5VOUT_L01_P005" (solid, pour order 5): 76.366,36.276 76.366,34.561 78.778,34.561 78.778,36.276
12to5Vin on Top Layer "12TO5VIN_L01_P018" (solid, pour order 18): 38.491,29.937 38.491,26.587 38.616,26.462 39.541,26.462 39.541,29.937 40.591,29.937 40.591,51.037 26.666,51.037 26.666,29.937
NetC17_1 on Top Layer "NETC17_1_L01_P010" (solid, pour order 10): 58.053,29.437 46.416,29.437 46.416,25.336 64.84,25.336 64.862,25.358 64.862,32.162 69.888,32.162 69.888,36.776 67.809,38.244 67.809,50.99 58.053,50.99
GND on Top Layer "GND_L01_P015" (solid, pour order 15): 41.779,31.928 41.779,30.074 43.684,30.074 43.684,31.928
NetC17_1 on Top Layer "NETC17_1_L01_P009" (solid, pour order 9): 73.19,36.776 73.19,34.969 75.629,34.969 75.629,35.831 74.706,35.822 74.706,36.776
NetC21_2 on Top Layer "NETC21_2_L01_P000" (solid, pour order 0): 78.991,37.276 77.306,37.276 77.306,36.982 78.991,36.982 78.991,35.223 85.509,35.223 85.509,39.668 78.991,39.668
GND on Bottom Layer "GND_L02_P017" (solid, pour order 17): 0.127,0 152.273,0 152.4,0.127 152.146,0.381 152.146,101.6 0.127,101.6 152.146,101.6 0.127,101.6

## Other copper
Top Layer:
  region net 5Vout: 76.397,34.936 76.394,34.931 76.609,34.766 76.612,34.77
  region net 5Vout: 76.394,34.986 76.394,34.733 76.538,34.588 76.619,34.588 76.619,34.959 76.646,34.986

## Silkscreen, mask and mechanical layers (free items; w line width, h text height)
Top Overlay:
  text "3V3" at 97.18,67.361 h1.52 r90
  text "5V0" at 97.028,34.722 h1.52 r90
  text "12V0" at 96.749,14.376 h1.52 r90

## Text inside footprints (layer, text, board x,y; h text height)
C1: Top 3D Body "RefDes2" at 53.619,21.445 h1.27 r270
C25: Top 3D Body "RefDes2" at 78.95,21.488 h1.27 r270
C26: Top 3D Body "RefDes2" at 83.522,27.432 h1.27
C27: Top 3D Body "RefDes2" at 83.548,57.484 h1.27
F1: Top 3D Body "RefDes2" at 4.393,27.189 h1.27; Top Overlay "REFDES" at 4.393,27.189 h1.27; Top Overlay "RefDes" at 4.711,27.189 h1.27
L2: Top 3D Body "RefDes2" at 52.258,42.444 h1.27
Q1: Top 3D Body "TAB" at 10.293,40.691 h0.64